# Altium PCB HEBoard_ver4.PcbDoc
Units mm, origin at the board's own origin, x right, y up, seen from the top; angles counter-clockwise.
Board outline 48.51 x 77.37 mm, 4 copper layers (Top Layer, GND, 3V3, Bottom Layer), stack 0.776 mm thick; 52 components, 33 nets, 207 pads, 91 vias.
Unrouted connection lines stored in the file: 2.
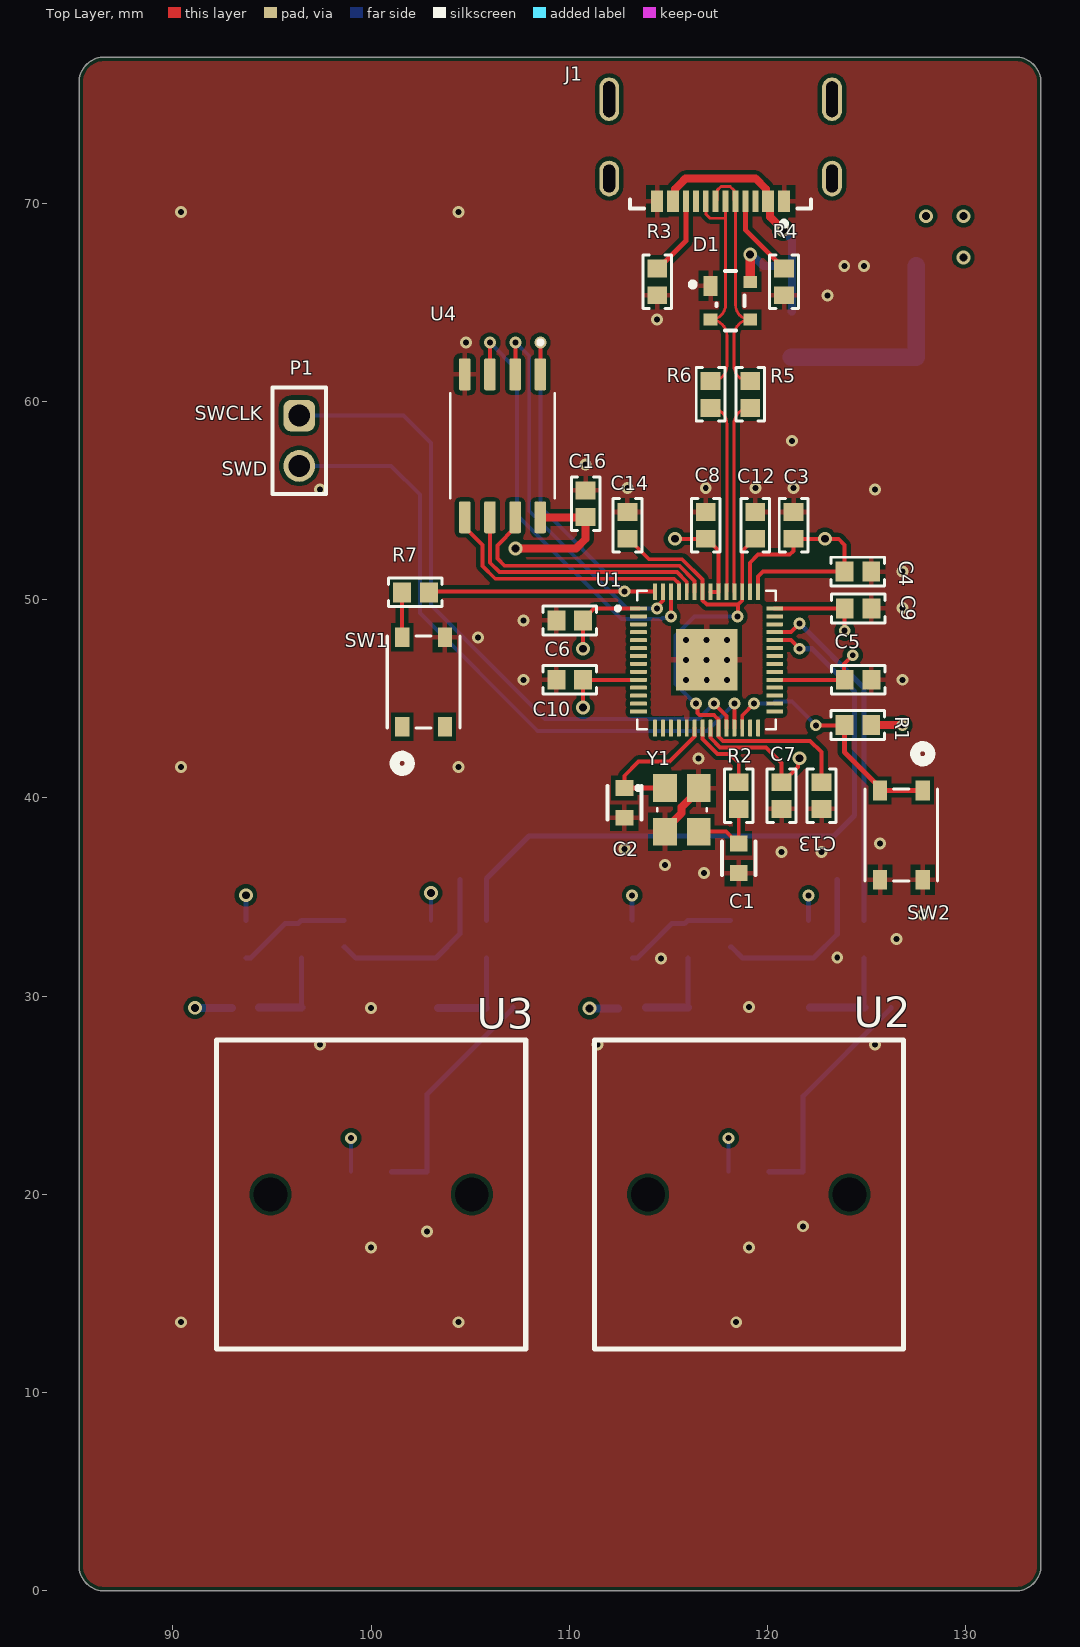
[diagram p0: Top Layer view]
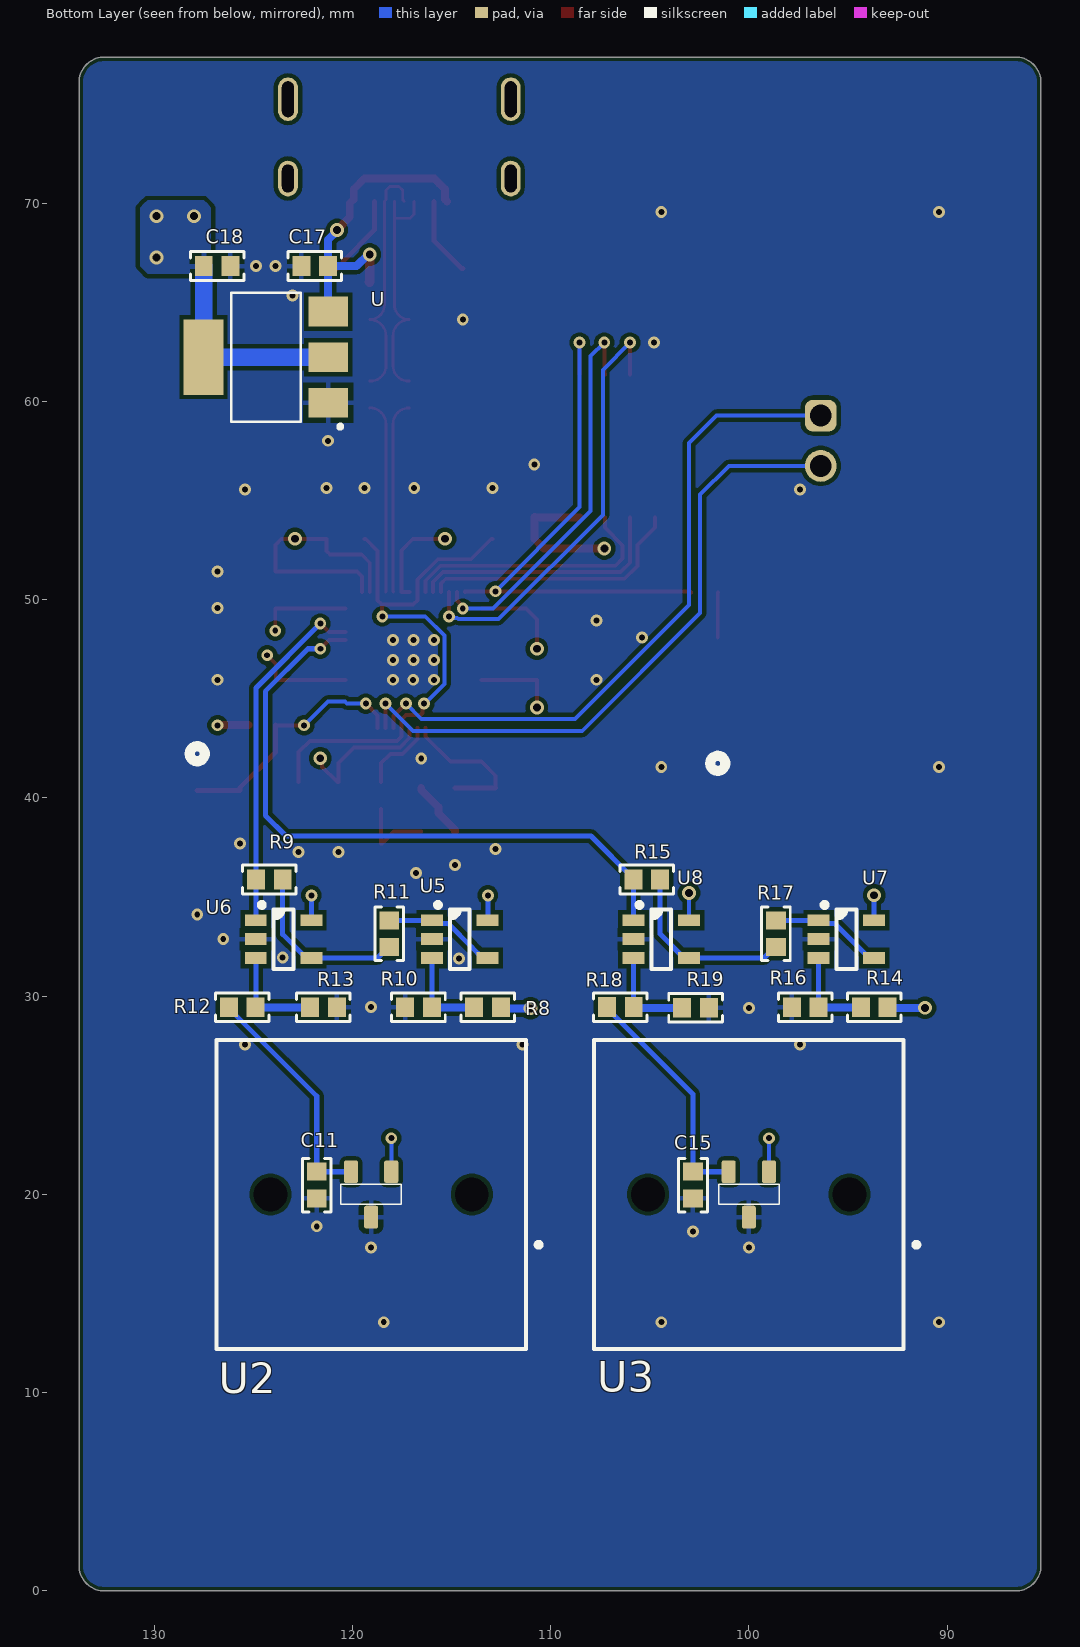
[diagram p1: Bottom Layer view, seen from below]
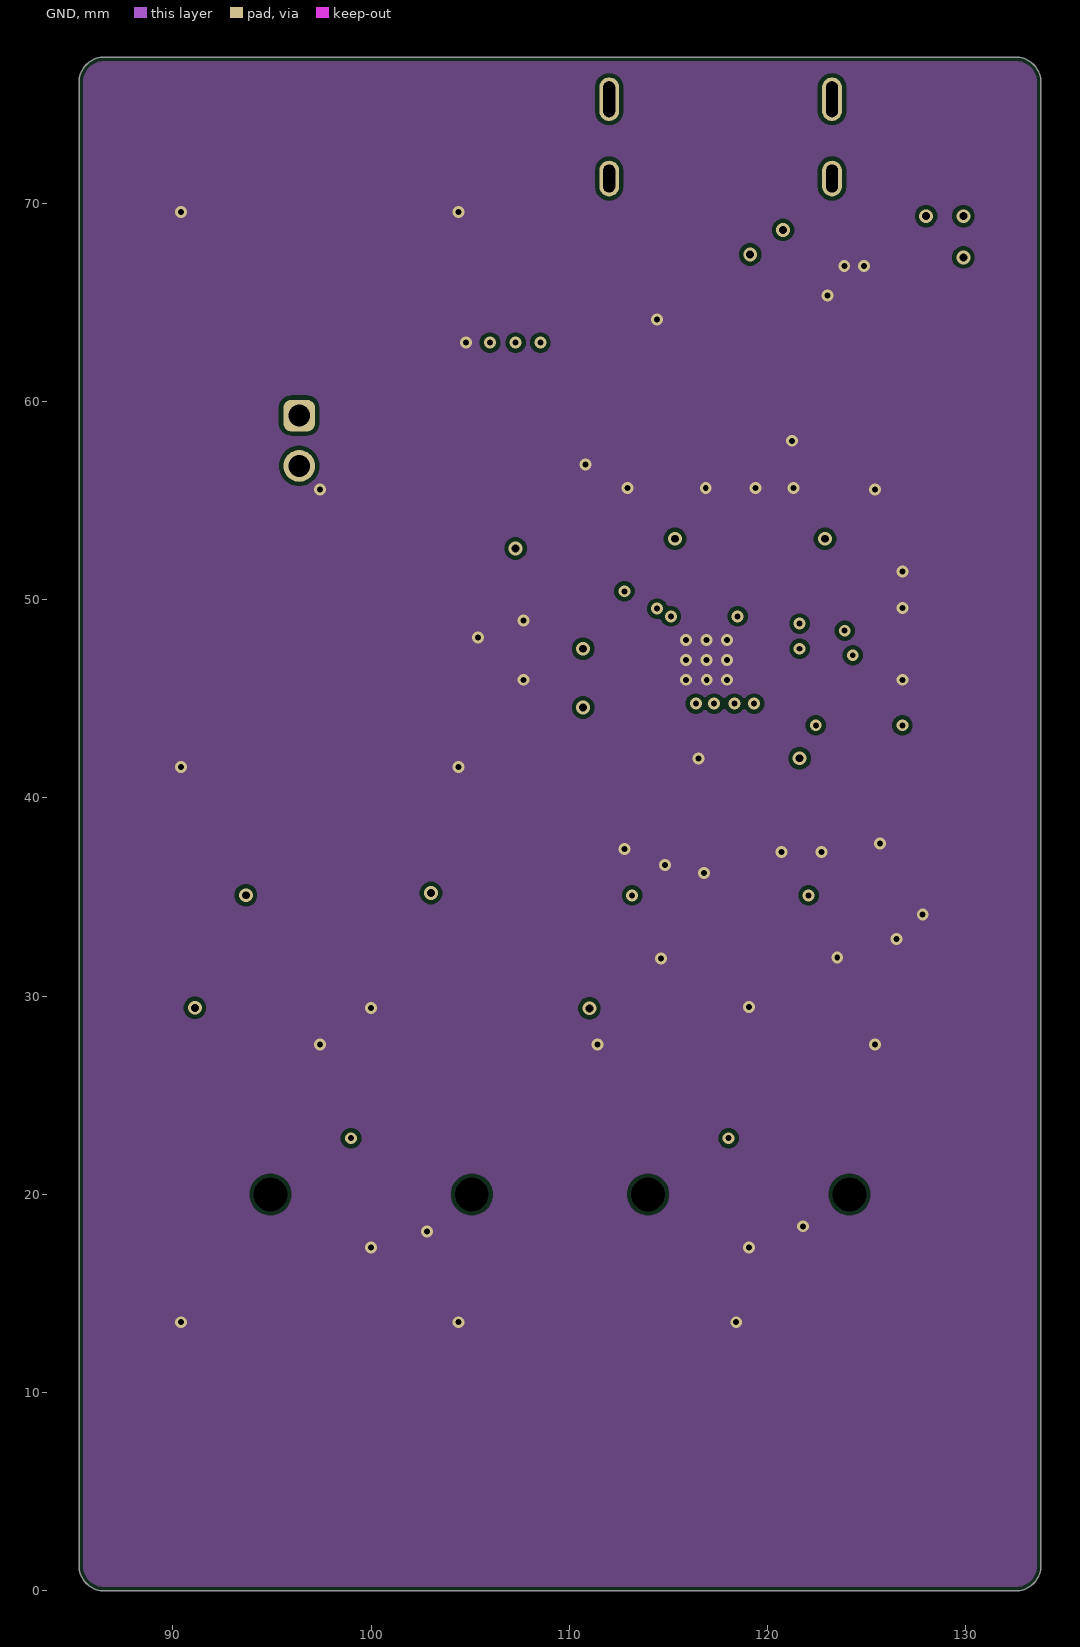
[diagram p2: GND]
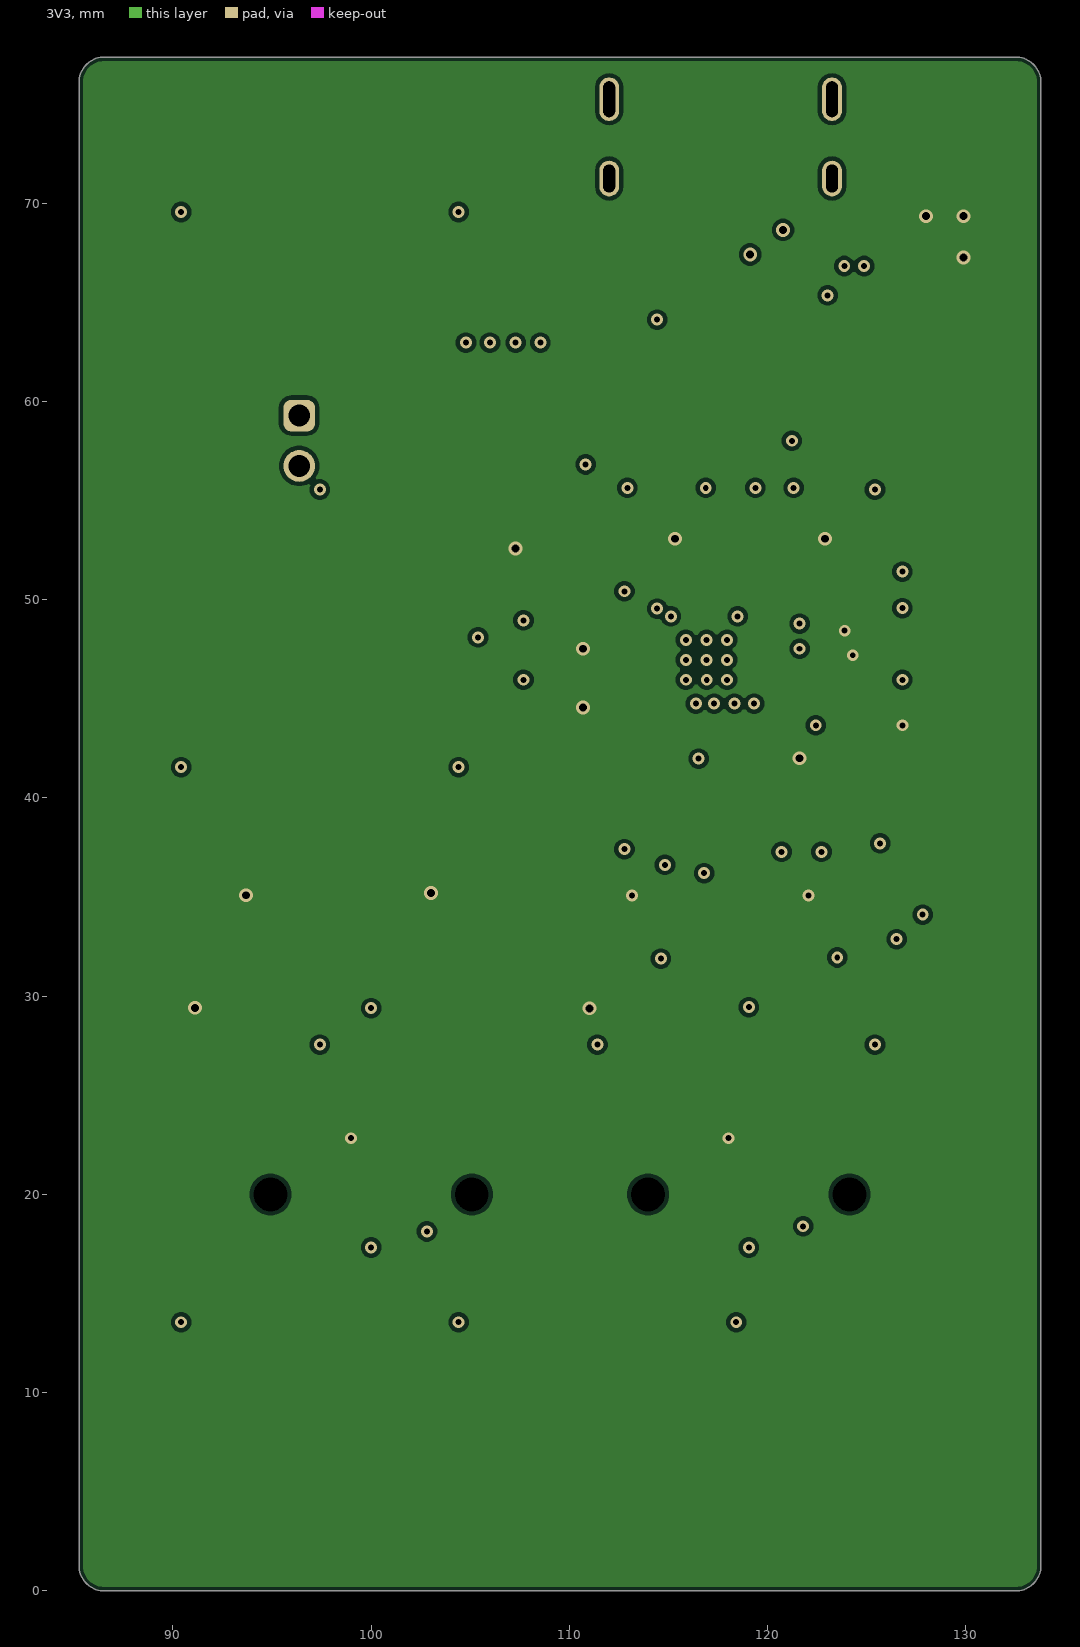
[diagram p3: 3V3]
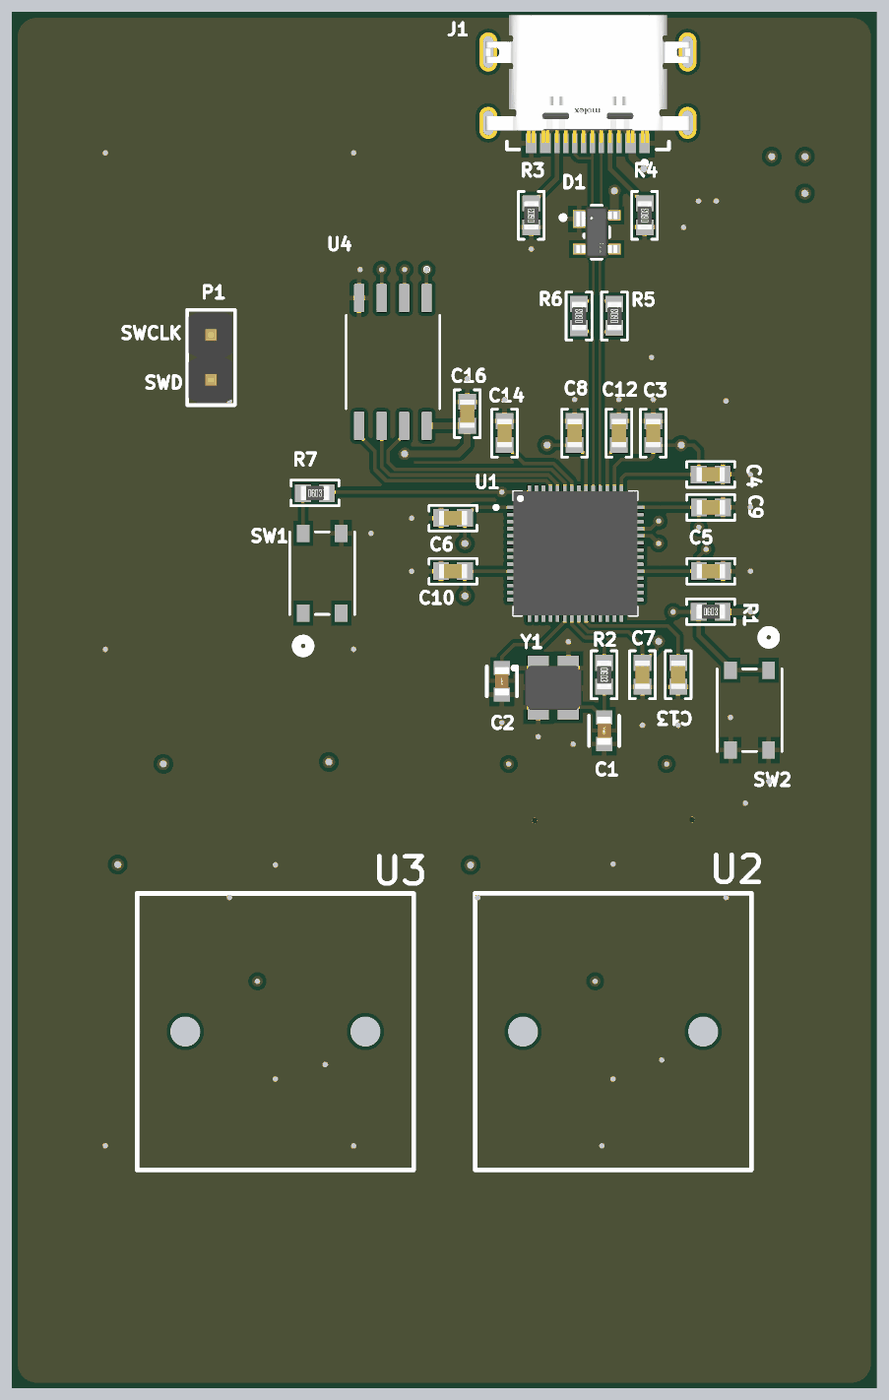
[diagram p4: 3D render of the assembled board from above, using the file's embedded part models]
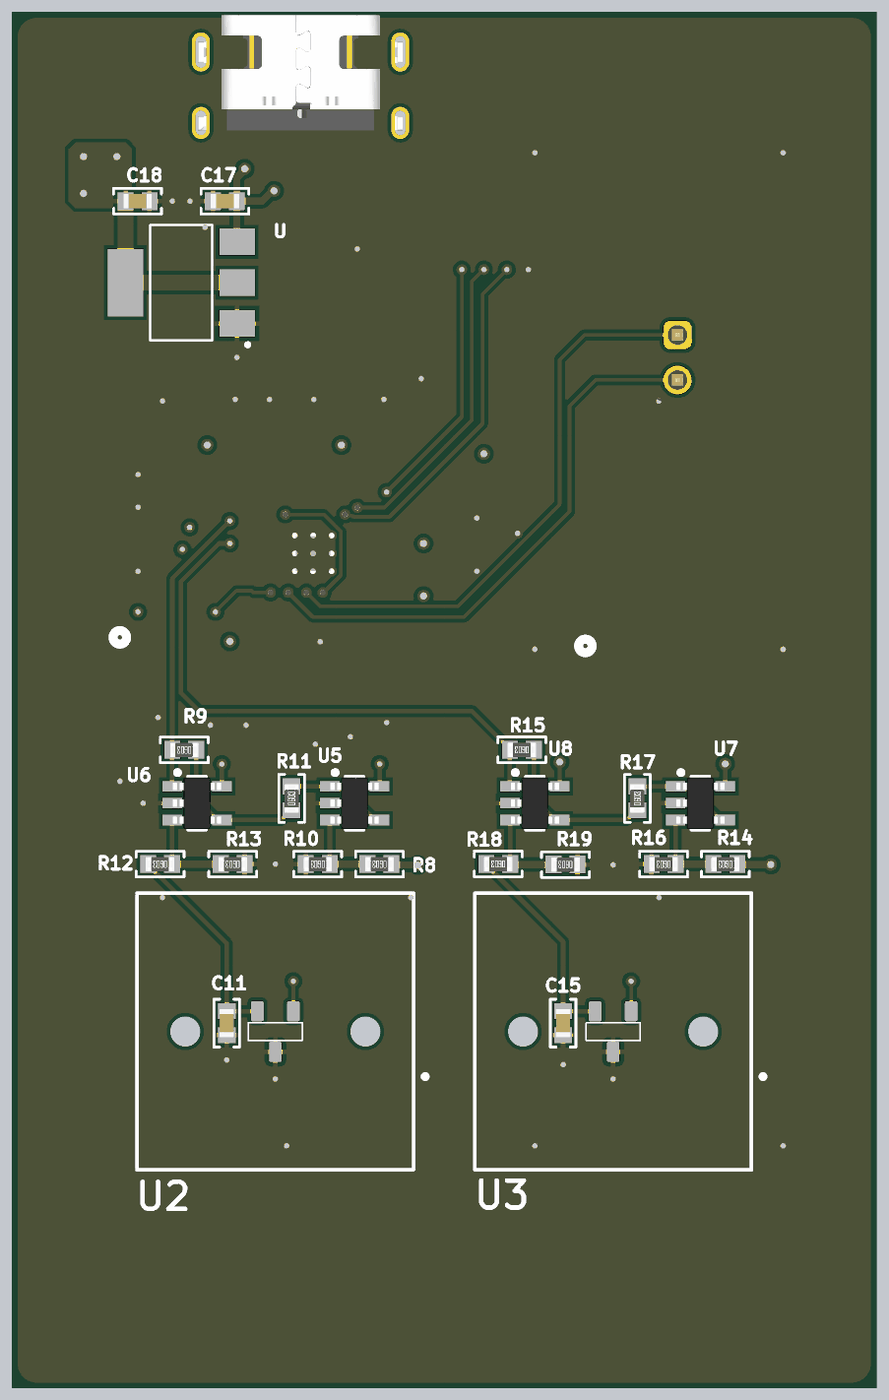
[diagram p5: 3D render of the assembled board from below, using the file's embedded part models]

## Layer stack, top to bottom
Top Solder: solder mask 0.0254, Solder Resist, Dk 4
Top Layer: signal copper 0.0356
Dielectric 1: core 0.254, FR-4, Dk 4.2
GND: signal copper 0.035
Dielectric1: prepreg 0.127, FR-4, Dk 4.2
3V3: signal copper 0.035
Dielectric 2: core 0.254, FR-4, Dk 4.2
Bottom Layer: signal copper 0.0356
Bottom Solder: solder mask 0.0254, Solder Resist, Dk 4

## Board outline
85.268,1.27 85.268,76.098 cw(c86.538,76.098) 86.538,77.368 132.512,77.368 cw(c132.512,76.098) 133.782,76.098 133.782,1.27 cw(c132.512,1.27) 132.512,0 86.538,0 cw(c86.538,1.27)

## Design rules (kind name [scope] priority, off if disabled: settings)
BoardOutlineClearance [All] p1: gap=0.2 ignorepadtopadclearanceinfootprint=FALSE except(0.4: Arc-SplitBarrior Arc-SplitContinuation Track-SplitBarrior Track-SplitContinuation SMDPad-SplitBarrior SMDPad-SplitContinuation THPad-SplitBarrior THPad-SplitContinuation Via-SplitBarrior Via-SplitContinuation Fill-SplitBarrior Fill-SplitContinuation Poly-SplitBarrior Poly-SplitContinuation Region-SplitBarrior Region-SplitContinuation Text-SplitBarrior Text-SplitContinuation)
Clearance [All] p1: gap=0.2 ignorepadtopadclearanceinfootprint=FALSE except(0.127: Arc-Arc Arc-Track Arc-SMDPad Arc-Via Track-Track Track-SMDPad Track-Via SMDPad-SMDPad SMDPad-Via THPad-Via Via-Via; 0.15: Arc-Text Track-Text SMDPad-Text THPad-Text Via-Text Fill-Text Poly-Text Region-Text Text-Text; 0.208: Arc-Poly Track-Poly SMDPad-Poly THPad-Poly Via-Poly Fill-Poly Poly-Poly)
ComponentClearance ComponentClearance_2 [InComponent('U3')] p1: gap=0 collisioncheckmode=3 verticalgap=0 showdistances=FALSE
ComponentClearance ComponentClearance_1 [InComponent('U2')] p2: gap=0 collisioncheckmode=3 verticalgap=0 showdistances=FALSE
ComponentClearance [All] p3: gap=0.254 collisioncheckmode=3 verticalgap=0.254 showdistances=FALSE
DiffPairsRouting [All] p1: maxlimit=0.208 minlimit=0.208 mostfreqgap=0.208 toplayer_minwidth=0.142 toplayer_maxwidth=0.142 toplayer_prefwidth=0.142 midlayer1_minwidth=0.381 midlayer1_maxwidth=0.381 midlayer1_prefwidth=0.381 midlayer2_minwidth=0.381 midlayer2_maxwidth=0.381 midlayer2_prefwidth=0.381 bottomlayer_minwidth=0.142 bottomlayer_maxwidth=0.142 bottomlayer_prefwidth=0.142 impedanceprofiledriven=TRUE maxuncoupledlength=12.7
HoleSize [All] p1: absolutevalues=TRUE maxlimit=6.3 minlimit=0.2 maxpercent=80.000 minpercent=20.000
MinimumAnnularRing [All] p1: minimumring=0.1
MinimumSolderMaskSliver [All] p1: minsoldermaskwidth=0.026
PlaneConnect [InNamedPolygon('+3V3_L04_P003')] p1: planeconnectstyle=Direct reliefexpansion=0.508 reliefentries=4 reliefconductorwidth=0.254 reliefairgap=0.254
PlaneConnect PlaneConnect_1 [All] p2: planeconnectstyle=Relief reliefexpansion=0.508 reliefentries=4 reliefconductorwidth=0.254 reliefairgap=0.254
PolygonConnect PolygonConnect_1 [All] p1: thpad.connectstyle=Relief thpad.reliefconductorwidth=0.254 thpad.reliefentries=4 thpad.polygonreliefangle="90 Angle" thpad.airgapwidth=0.254 smdpad.connectstyle=Relief smdpad.reliefconductorwidth=0.254 smdpad.reliefentries=4 smdpad.polygonreliefangle="90 Angle" smdpad.airgapwidth=0.254 via.connectstyle=Direct via.reliefconductorwidth=0.508 via.reliefentries=4 via.polygonreliefangle="90 Angle" via.airgapwidth=0.254
RoutingCorners [All] p1: cornerstyle=Round minsetback=2.54 maxsetback=2.54
RoutingVias [All] p1: holewidth=0.3 width=0.5 viastyle="Through Hole" minholewidth=0.3 minwidth=0.5 maxholewidth=6.3 maxwidth=10
SilkToSilkClearance [All] p1: silktosilkclearance=0.1
SilkToSolderMaskClearance [IsPad] p1: minsilkscreentomaskgap=0.15 clearancetoexposedcopper=TRUE
SolderMaskExpansion [All] p1: expansion=0.038 istentingtop=FALSE
Width [All] p1: maxlimit=10 minlimit=0.2 preferedwidth=0.254
22 further rules are at their usual default settings.

## Classes and differential pairs
component class HEBoard_ver4: C1 C2 C3 C4 C5 C6 C7 C8 C9 C10 C11 C12 C13 C14 C15 C16 C17 C18 D1 J1 P1 R1 R2 R3 R4 R5 R6 R7 SW1 SW2 U U1 U2 U3 U4 Y1
component class HEBoard_AFE: R8 R9 R10 R11 R12 R13 R14 R15 R16 R17 R18 R19 U5 U6 U7 U8
differential pair D: +D_P -D_N

## Components (designator, comment, footprint, x,y, rotation, side; value= is the part's Value field where it differs from the comment)
C1 "15pF" FP-CC0603-0_9-MFG 118.542,36.957 r270 top
C2 "15pF" FP-CC0603-0_9-MFG 112.776,39.751 r270 top
C3 "CAP CER 1UF 50V X5R 0603" "CAP 0603_1608" 121.31,53.746 r270 top
C4 "CAP CER 0.1UF 100V 10% X7R 0603" "CAP 0603_1608" 124.552,51.415 r180 top
C5 "CAP CER 0.1UF 100V 10% X7R 0603" "CAP 0603_1608" 124.562,45.959 r180 top
C6 "CAP CER 0.1UF 100V 10% X7R 0603" "CAP 0603_1608" 110.018,48.954 r0 top
C7 "CAP CER 0.1UF 100V 10% X7R 0603" "CAP 0603_1608" 120.701,40.117 r90 top
C8 "CAP CER 0.1UF 100V 10% X7R 0603" "CAP 0603_1608" 116.877,53.746 r270 top
C9 "CAP CER 0.1UF 100V 10% X7R 0603" "CAP 0603_1608" 124.562,49.559 r180 top
C10 "CAP CER 0.1UF 100V 10% X7R 0603" "CAP 0603_1608" 110.018,45.959 r0 top
C11 "CAP CER 0.1UF 100V 10% X7R 0603" "CAP 0603_1608" 121.793,20.472 r270 bottom
C12 "CAP CER 1UF 50V X5R 0603" "CAP 0603_1608" 119.377,53.746 r270 top
C13 "CAP CER 0.1UF 100V 10% X7R 0603" "CAP 0603_1608" 122.719,40.117 r90 top
C14 "CAP CER 0.1UF 100V 10% X7R 0603" "CAP 0603_1608" 112.926,53.746 r270 top
C15 "CAP CER 0.1UF 100V 10% X7R 0603" "CAP 0603_1608" 102.819,20.472 r270 bottom
C16 "CAP CER 0.1UF 100V 10% X7R 0603" "CAP 0603_1608" 110.82,54.839 r270 top
C17 "CAP CER 10UF 25V 20% X5R 0603" "CAP 0603_1608" 121.895,66.827 r180 bottom
C18 "CAP CER 10UF 25V 20% X5R 0603" "CAP 0603_1608" 126.822,66.827 r180 bottom
D1 "PRTR5V0U2X,215" FP-SOT143B-MFG 118.124,65.077 r0 top
J1 "216990-0001" FP-216990-0001-MFG 117.627,74.092 r180 top
P1 "61300211121" 61300211121 96.371,58.014 r270 top
R1 "RES 1K OHM 1% 1/10W 0603" "RES 0603_1608" 124.552,43.678 r0 top
R2 "RES 1K OHM 1% 1/10W 0603" "RES 0603_1608" 118.542,40.117 r270 top
R3 "RES 5.1K OHM 1% 1/10W 0603" "RES 0603_1608" 114.427,66.027 r90 top
R4 "RES 5.1K OHM 1% 1/10W 0603" "RES 0603_1608" 120.827,66.027 r90 top
R5 "RES 22.1 OHM 1% 1/10W 0603" "RES 0603_1608" 119.124,60.35 r90 top
R6 "RES 22.1 OHM 1% 1/10W 0603" "RES 0603_1608" 117.123,60.35 r90 top
R7 "RES 1K OHM 1% 1/10W 0603" "RES 0603_1608" 102.235,50.368 r0 top
R8 "RES 2.21K OHM" "RES 0603_1608" 113.179,29.439 r0 bottom
R9 "RES 5.1K OHM 1% 1/10W 0603" "RES 0603_1608" 124.186,35.88 r0 bottom
R10 "RES 4.7K OHM" "RES 0603_1608" 116.662,29.439 r0 bottom
R11 "RES 1.6K OHM 1% 1/10W 0603" "RES 0603_1608" 118.135,33.147 r90 bottom
R12 "RES 1.6K OHM 1% 1/10W 0603" "RES 0603_1608" 125.55,29.439 r0 bottom
R13 "RES 5.1K OHM 1% 1/10W 0603" "RES 0603_1608" 121.456,29.439 r0 bottom
R14 "RES 2.21K OHM" "RES 0603_1608" 93.672,29.439 r0 bottom
R15 "RES 5.1K OHM 1% 1/10W 0603" "RES 0603_1608" 105.148,35.888 r0 bottom
R16 "RES 4.7K OHM" "RES 0603_1608" 97.155,29.439 r0 bottom
R17 "RES 1.6K OHM 1% 1/10W 0603" "RES 0603_1608" 98.635,33.147 r90 bottom
R18 "RES 1.6K OHM 1% 1/10W 0603" "RES 0603_1608" 106.481,29.446 r0 bottom
R19 "RES 5.1K OHM 1% 1/10W 0603" "RES 0603_1608" 102.688,29.413 r0 bottom
SW1 "PTS815 SJM 250 SMTR LFS" "SW4_PTS815 SJM 250 SMTR LFS_CNK" 102.641,45.847 r90 top
SW2 "PTS815 SJM 250 SMTR LFS" "SW4_PTS815 SJM 250 SMTR LFS_CNK" 126.746,38.125 r270 top
U "NCP1117LPST33T3G" SOT230P700X175-4N 124.358,62.23 r0 bottom
U1 "RP2040_1" QFN40P700X700X90-57N 116.92,46.959 r0 top
U2 "SS39ET" CHRY-MX1A-11NW_V 119.05,20 r0 bottom
U3 "SS39ET" CHRY-MX1A-11NW_V 100,20 r0 bottom
U4 "W25Q128JVSIQ" SOIC127P790X216-8N 106.629,57.76 r270 top
U5 "IC OPAMP GP 1 CIRCUIT SOT23-5" "SOT 23-5" 114.579,32.878 r180 bottom
U6 "IC OPAMP GP 1 CIRCUIT SOT23-5" "SOT 23-5" 123.466,32.878 r180 bottom
U7 "IC OPAMP GP 1 CIRCUIT SOT23-5" "SOT 23-5" 95.079,32.878 r180 bottom
U8 "IC OPAMP GP 1 CIRCUIT SOT23-5" "SOT 23-5" 104.416,32.878 r180 bottom
Y1 "12MHz" XTAL_ABM8G-12.000MHZ-4Y-T3 115.672,39.395 r0 top

## Footprints (in the part's own frame and the unit in brackets; to place one, negate y for a bottom-side part, rotate by r counter-clockwise, add the part's x,y. Pads: shape width x height; smd on the part's side, far side on the other; paste and mask are expansions set on the pad)
61300211121 [mm] "Pin Header, pitch 2.54 mm, THT, Vertical, single row, 2p"
  rrect50% 1.6x1.6 hole 1.1: 1(-1.27,0)
  round 1.6 hole 1.1: 2(1.27,0)
  silkscreen extent -2.69,-1.35 2.69,1.35, body extent -2.54,-1.27 2.54,1.27, height 8.57
"CAP 0603_1608" [mm] "Chip Capacitor, 2-Leads, Body 1.60x0.80mm, IPC Medium Density"
  rect 0.9x1 smd: 1(-0.675,0) 2(0.675,0)
  silkscreen extent -1.35,-0.72 1.35,0.72, body extent -0.8,-0.41 0.8,0.41, height 0.82
CHRY-MX1A-11NW_V [mil] "THD, 2-Leads, Body 15.6x15.6mm"
  rrect30% 28x45 smd: 1(-40,-45) 2(40,-45) 3(0,45)
  round 0 hole 67 unplated paste-99999: MH2(-200,0) MH3(200,0)
  silkscreen extent -338,-307 307,307
FP-216990-0001-MFG [mm]
  rrect100% 1x1.8 hole 1.4 slot 0.6 at 0 deg paste-2539.97 mask+0: 1(-5.62,2.85) 2(5.62,2.85)
  rrect100% 1x2.2 hole 1.8 slot 0.6 at 0 deg paste-2539.97 mask+0: 3(-5.62,-1.15) 4(5.62,-1.15)
  rect 0.6x1.1 smd paste+0 mask+0: A1-B12(-3.2,4) A4-B9(-2.4,4) A9-B4(2.4,4) A12-B1(3.2,4)
  rect 0.3x1.1 smd paste+0 mask+0: A5(-1.25,4) A6(-0.25,4) A7(0.25,4) A8(1.25,4) B5(1.75,4) B6(0.75,4) B7(-0.75,4) B8(-1.75,4)
  silkscreen extent -4.57,3.9 4.57,5.25, body extent -6.22,-3.45 6.22,4.65, height 0.25
FP-CC0603-0_9-MFG [mm]
  rect 0.8x0.9 smd paste+0 mask+0: 1(-0.75,0) 2(0.75,0)
  silkscreen extent -0.85,-0.85 0.85,0.85, body extent -1.43,-0.82 1.43,0.82, height 0.25
FP-SOT143B-MFG [mm]
  rect 0.7x1 smd paste-1000 mask+0: 1(-1,0.75)
  rect 0.7x0.6 smd paste-1000 mask+0: 2(-1,-0.95) 3(1,-0.95) 4(1,0.95)
  silkscreen extent -2.02,-1.5 0.7,1.5, body extent -1.5,-1.63 1.5,1.63, height 0.25
QFN40P700X700X90-57N [mm]
  rrect25% 0.84x0.2 smd: 1(-3.435,2.6) 2(-3.435,2.2) 3(-3.435,1.8) 4(-3.435,1.4) 5(-3.435,1) 6(-3.435,0.6) 7(-3.435,0.2) 8(-3.435,-0.2) 9(-3.435,-0.6) 10(-3.435,-1) 11(-3.435,-1.4) 12(-3.435,-1.8) 13(-3.435,-2.2) 14(-3.435,-2.6) 29(3.435,-2.6) 30(3.435,-2.2) 31(3.435,-1.8) 32(3.435,-1.4) 33(3.435,-1) 34(3.435,-0.6) 35(3.435,-0.2) 36(3.435,0.2) 37(3.435,0.6) 38(3.435,1) 39(3.435,1.4) 40(3.435,1.8) 41(3.435,2.2) 42(3.435,2.6)
  rrect25% 0.2x0.84 smd: 15(-2.6,-3.435) 16(-2.2,-3.435) 17(-1.8,-3.435) 18(-1.4,-3.435) 19(-1,-3.435) 20(-0.6,-3.435) 21(-0.2,-3.435) 22(0.2,-3.435) 23(0.6,-3.435) 24(1,-3.435) 25(1.4,-3.435) 26(1.8,-3.435) 27(2.2,-3.435) 28(2.6,-3.435) 43(2.6,3.435) 44(2.2,3.435) 45(1.8,3.435) 46(1.4,3.435) 47(1,3.435) 48(0.6,3.435) 49(0.2,3.435) 50(-0.2,3.435) 51(-0.6,3.435) 52(-1,3.435) 53(-1.4,3.435) 54(-1.8,3.435) 55(-2.2,3.435) 56(-2.6,3.435)
  rect 3.1x3.1 smd paste-0.57: 57(0,0)
  silkscreen extent -4.57,-3.5 3.5,3.5, body extent -3.5,-3.5 3.5,3.5, height 0.9
"RES 0603_1608" [mm] "Chip Resistor, 2-Leads, Body 1.60x0.80mm, IPC Medium Density"
  rect 0.9x1 smd: 1(-0.675,0) 2(0.675,0)
  silkscreen extent -1.35,-0.72 1.35,0.72, body extent -0.8,-0.4 0.8,0.4, height 0.45
SOIC127P790X216-8N [mm]
  rrect25% 1.61x0.58 smd: 1(-3.605,1.905) 2(-3.605,0.635) 3(-3.605,-0.635) 4(-3.605,-1.905) 5(3.605,-1.905) 6(3.605,-0.635) 7(3.605,0.635) 8(3.605,1.905)
  silkscreen extent -5.31,-2.64 2.64,2.64
SOT230P700X175-4N [mm]
  rect 2x1.5 smd: 1(-3.15,2.3) 2(-3.15,0) 3(-3.15,-2.3)
  rect 2x3.8 smd: 4(3.15,0)
  silkscreen extent -3.85,-3.25 1.75,3.6
"SOT 23-5" [mm] "SOT23, 5-Leads, Body 2.90x2.70mm, Pitch 0.95mm, IPC Medium Density"
  rect 1.1x0.6 smd: 1(-1.4,0.95) 2(-1.4,0) 3(-1.4,-0.95) 4(1.4,-0.95) 5(1.4,0.95)
  silkscreen extent -1.23,-1.5 0.5,1.85, body extent -1.36,-1.45 1.36,1.45, height 1.19
"SW4_PTS815 SJM 250 SMTR LFS_CNK" [mm]
  rect 0.991x0.711 smd paste+0 mask+0: 1(-2.25,1.075) 2(2.25,1.075) 3(-2.25,-1.075) 4(2.25,-1.075)
  silkscreen extent -4.48,-1.83 2.32,1.83
XTAL_ABM8G-12.000MHZ-4Y-T3 [mm]
  rect 1.2x1.4 smd: 1(-0.85,1.1) 2(-0.85,-1.1) 3(0.85,-1.1) 4(0.85,1.1)
  silkscreen extent -2.3,-0.08 1.25,1.2, body extent -1.6,-1.24 1.6,1.24, height 0.99

## Part data
C1 C2: library part CMP-03422-001493-1, "CAP CER 15PF 50V C0G/NPO 0603", Case Code (Imperial)=0603, Case Code (Metric)=1608, Dielectric=C0G, Dielectric Material=Ceramic, Insulation Resistance=100GR, Max Operating Temperature=125°C, Min Operating Temperature=-55°C, Package Quantity=1, Tolerance=5%, Voltage Rating=50V, Capacitance=15pF, Case/Package=0603, Depth=0.8mm, Height=0.8mm, Lead Free="Lead Free", Length=1.6mm, Mount="Surface Mount", Number of Pins=2, Packaging="Tape and Reel", Radiation Hardening=No, REACH SVHC="No SVHC", RoHS Compliant=Yes, Series=CC, Termination=SMD/SMT, Thickness=0.035inch, Width=0.031inch
C3 C12: library part CMP-013-0013-8, "1µF ±10% 50V Ceramic Capacitor X7R 0603 (1608 Metric)", Capacitance=1µF, Case/Package=0603, Dielectric Code=X5R, Tolerance=10%, Voltage Rating=50V
C4 C5 C6 C7 C8 C9 C10 C11 C13 C14 C15 C16: library part CMP-013-0022-14, "Ceramic Capacitor, Multilayer, Ceramic, 100V, 10% +Tol, 10% -Tol, X7R, 15% TC, 0.1uF, Surface Mount, 0603", Capacitance=100nF, Case/Package=0603, Dielectric Code=X7R, Tolerance=10%, Voltage Rating=100V
C17 C18: library part CMP-013-0018-6, "10µF ±20% 25V Ceramic Capacitor X5R 0603 (1608 Metric)", Capacitance=10µF, Case/Package=0603, Dielectric Code=X5R, Tolerance=20%, Voltage Rating=25V
D1: library part CMP-14436-000007-1, "TVS DIODE 5.5V SOT143B"
J1: library part CMP-04767-000014-1, "CONN RCP USB2.0 TYP C 24P SMD RA"
P1: library part CMP-1712-00002-5, Color=Black, Contact Resistance=20mΩ, Current Rating=3A, Max Operating Temperature=125°C, Min Operating Temperature=-40°C, Operating Supply Voltage=250V, Connector Type="Male Pin", Contact Gender=Male, Contact Material=Copper, Contact Mating Length=5.9944mm, Contact Plating=Gold, Gender=Male, Height=8.94mm, Housing Material=PBT, Lead Free="Lead Free", Lead Pitch=2.54mm, Mount="Through Hole", NexarPartId=20081794, Number of Contacts=2, Number of Pins=2, Number of Positions=2, Number of Rows=1, Orientation=Vertical, Packaging=Bulk, Pitch=2.54mm, REACH SVHC="No SVHC", RoHS=Compliant, Termination="Through Hole", Voltage Rating=250V
R1 R2 R7: library part CMP-009-00014-17, "1 kOhms ±1% 0.1W, 1/10W Chip Resistor 0603 (1608 Metric) Moisture Resistant Thick Film", Case/Package=0603, Power Rating=100mW, Resistance=1k, Temperature Coefficient=100ppm/°C, Tolerance=1%, Voltage Rating=75V
R3 R4 R9 R13 R15 R19: library part CMP-00051-2, "5.1 kOhms ±1% 0.1W, 1/10W Chip Resistor 0603 (1608 Metric) Automotive AEC-Q200 Thick Film", Case/Package=0603, Power Rating=100mW, Resistance=5.1k, Temperature Coefficient=100ppm/°C, Tolerance=1%, Voltage Rating=75V
R5 R6: library part CMP-009-00193-9, "Fixed Resistor, Metal Glaze/thick Film, 0.1W, 22.1ohm, 75V, 1% +/-Tol, 100ppm/Cel, Surface Mount, 0603", Case/Package=0603, Temperature Coefficient=100ppm/°C, Voltage Rating=75V
R8 R14: library part CMP-010-0027-7, "2.21 kOhms ±1% 0.1W, 1/10W Chip Resistor 0603 (1608 Metric) Automotive AEC-Q200, Moisture Resistant Thick Film", Case/Package=0603, Power Rating=100mW, Resistance=2.21k, Temperature Coefficient=100ppm/°C, Tolerance=1%, Voltage Rating=75V
R10 R16: library part CMP-010-0075-8, "Fixed Resistor, Metal Glaze/thick Film, 0.1W, 4700ohm, 75V, 1% +/-Tol, 100ppm/Cel, Surface Mount, 0603", Case/Package=0603, Power Rating=100mW, Resistance=4.7k, Temperature Coefficient=100ppm/°C, Tolerance=1%, Voltage Rating=75V
R11 R12 R17 R18: library part CMP-010-0019-7, "1.6 kOhms ±1% 0.1W, 1/10W Chip Resistor 0603 (1608 Metric) Moisture Resistant Thick Film", Case/Package=0603, Power Rating=100mW, Resistance=1.6k, Temperature Coefficient=100ppm/°C, Tolerance=1%, Voltage Rating=75V
SW1 SW2: "No Description Available", Mfr_Name="C&K Components", RefDes=RefDes, Type=Type
U: "Linear Voltage Regulator IC 1 Output 1A SOT-223", Package="SOT-223 ON Semiconductor", Availability=Unavailable, MF="ON Semiconductor", MP=NCP1117LPST33T3G, Price=None, SnapEDA_Link=https://www.snapeda.com/parts/NCP1117LPST33T3G/ON%20Semiconductor/view-part/421194/?ref=snap
U1: "RP2040 chip for Raspberry Pi Pico - ARMÂ® CortexÂ®-M0+ MCU 32-Bit", Package=None, Availability="In Stock", Check_prices=https://www.snapeda.com/parts/RP2040/Raspberry+Pi/view-part/?ref=eda, MF="Raspberry Pi", MP=RP2040, Price=None, Purchase-URL=https://pricing.snapeda.com/search/part/RP2040/?ref=eda, SnapEDA_Link=https://www.snapeda.com/parts/RP2040/Raspberry+Pi/view-part/?ref=snap
U2 U3: "analog Hall Effect Sensor 1.5 mA 2.7 - 6.5 V dc", Package=None, Check_prices=https://www.snapeda.com/parts/SS39ET/Honeywell+Sensing+and+Productivity+Solutions/view-part/?ref=eda, MF="Honeywell Sensing and Productivity Solutions", MP=SS39ET, SnapEDA_Link=https://www.snapeda.com/parts/SS39ET/Honeywell+Sensing+and+Productivity+Solutions/view-part/?ref=snap
U4: "FLASH - NOR Memory IC 128Mb (16M x 8) SPI - Quad I/O, QPI, DTR 133 MHz 8-SOIC", Package="SOIC-8 Winbond", Availability="In Stock", Check_prices=https://www.snapeda.com/parts/W25Q128JVSIQ/Winbond+Electronics/view-part/?ref=eda, MF="Winbond Electronics", MP=W25Q128JVSIQ, Price=None, Purchase-URL=https://pricing.snapeda.com/search/part/W25Q128JVSIQ/?ref=eda, SnapEDA_Link=https://www.snapeda.com/parts/W25Q128JVSIQ/Winbond+Electronics/view-part/?ref=snap
U5 U6 U7 U8: library part CMP-031-00034-5, "General Purpose Amplifier 1 Circuit Rail-to-Rail SOT-23-5", Case/Package=SOT-23-5, Manufacturer 1=TI, Manufacturer Part Number=TLV9051IDBVR, Max Operating Temperature=125°C, Max Supply Voltage=5.5V, Min Operating Temperature=-40°C, Min Supply Voltage=1.8V, Supplier Part Number 1=296-TLV9051IDBVRCT-ND, Mounting Technology="Surface Mount", Pins=5, Supplier 1=DigiKey
Y1: library part ABM8G-12.000MHZ-4Y-T3, "12 MHz Â±30ppm Crystal 10pF 120 Ohms 4-SMD, No Lead", Package="SMD-4 Abracon", Availability="In Stock", Check_prices=https://www.snapeda.com/parts/ABM8G-12.000MHZ-4Y-T3/Abracon+LLC/view-part/?ref=eda, MF=Abracon, MP=ABM8G-12.000MHZ-4Y-T3, Price=None, Purchase-URL=https://pricing.snapeda.com/search/part/ABM8G-12.000MHZ-4Y-T3/?ref=eda, SnapEDA_Link=https://www.snapeda.com/parts/ABM8G-12.000MHZ-4Y-T3/Abracon+LLC/view-part/?ref=snap

## Via types
v1: diameter 0.6, hole 0.3, Top Layer to Bottom Layer, tented both sides, 76 vias
v2: diameter 0.7, hole 0.4, Top Layer to Bottom Layer, tented both sides, 15 vias

## Nets (pads, with @x,y where several pads share a name; then routed paths per layer and width w, separated by ;. In a path a pad name is that pad's centre, name@x,y a point inside that pad or via, vN(x,y) a via of type N, cw(c..) or ccw(c..) an arc to the next point about the centre after c; other vN are vias at no path point)
+1V1: C12.2 C13.2 C14.2 U1.23 U1.45 U1.50 | length 29
  Top Layer w0.2: C14.2 112.976,53.071 114.009,52.038 115.689,52.038 116.72,51.007 U1.50 116.72,49.967 116.94,49.747 118.499,49.747 ; v1(116.377,44.759) 116.454,44.682 116.454,44.288 116.571,44.171 116.737,44.171 117.299,44.171 117.52,43.95 U1.23 117.52,43.097 117.74,42.877 117.964,42.877 117.965,42.875 122.143,42.875 122.709,42.309 C13.2@122.709,40.792 ; v1@118.356,49.235 v1@118.391,49.235 ; v1(118.488,49.159) 118.412,49.235 v1@118.391,49.235 ; C12.2 119.327,53.071 118.72,52.464 U1.45 118.72,49.967 118.499,49.747 ; v1@118.391,49.235 118.499,49.343 118.499,49.747
  Bottom Layer w0.2: v1(116.377,44.759) 116.332,44.759 115.35,45.74 115.35,48.188 116.32,49.159 v1(118.488,49.159)
+3V3: C3.2 C4.2 C5.2 C6.2 C7.2 C8.2 C9.2 C10.2 C16.2 C18.1 R1.2 R8.1 R14.1 U1.1 U1.10 U1.22 U1.33 U1.42 U1.43 U1.44 U1.48 U1.49 U2.1 U3.1 U4.8 U5.5 U6.5 U7.5 U8.5 U.2 U.4 | length 75.7
  Top Layer w0.2: v2(110.693,44.559) C10.2 113.165,45.959 U1.10 ; v2(110.693,47.523) C6.2 110.693,49.004 111.248,49.559 U1.1 ; v2(115.327,53.071) C8.2 116.927,53.071 117.52,52.479 U1.48 U1.49 ; U1.22 117.12,43.035 117.605,42.55 117.828,42.55 117.83,42.548 119.913,42.548 120.701,41.761 C7.2 120.751,40.792 121.52,41.561 121.52,41.903 v2(121.615,41.999) ; U1.44 119.12,51.862 119.524,52.267 121.114,52.267 121.31,52.464 C3.2 v2(122.89,53.071) 123.563,53.071 123.877,52.758 C4.2 119.755,51.415 119.52,51.179 U1.43 ; U1.33 C5.2 123.861,45.984 123.861,46.765 v1(124.292,47.196) ; U1.42 C9.2 ; v1(123.887,48.434) C9.2
  Top Layer w0.4: v2(107.29,52.581) 110.334,52.581 110.82,53.067 C16.2 110.811,54.155 U4.8 ; R1.2 125.234,43.67 126.789,43.67 v1(126.797,43.663)
  Bottom Layer w0.2: R14.1@92.971,29.413 R14.1 ; U3.1 v1(98.984,22.835) ; U8.5 v2(103.016,35.202) ; R8.1@112.454,29.389 R8.1 ; U5.5@113.162,33.845 U5.5 ; U2.1 v1(118.034,22.835)
  Bottom Layer w0.254: U7.5 v2(93.679,35.091) ; U5.5@113.162,33.845 v1(113.162,35.083) ; U6.5 v1(122.066,35.083)
  Bottom Layer w0.4: v2(91.11,29.413) R14.1@92.971,29.413 ; v2(111.009,29.389) R8.1@112.454,29.389
  Bottom Layer w0.9: U.2 127.486,62.23 127.497,62.241 C18.1
  other v2: 129.87,67.263 127.991,69.342 129.87,69.342
+5V: C17.2 D1.4 J1.A4-B9 J1.A9-B4 U.3 | length 16.1
  Top Layer w0.4: J1.A9-B4 115.327,70.192 115.327,70.704 115.592,70.969 115.861,71.238 119.394,71.238 119.927,70.704 119.927,70.192 120.127,69.992 120.127,69.302 v2(120.777,68.652)
  Top Layer w0.5: v2(119.12,67.412) 119.122,67.41 119.122,66.029 D1.4
  Bottom Layer w0.4: v2(119.12,67.412) 119.201,67.412 119.785,66.827 C17.2 ; v2(120.777,68.652) 120.777,68.598 121.22,68.156 C17.2 ; U.3 121.22,64.541 C17.2
A1_IN: C11.1 R12.2 U2.2 | length 11.9
  Bottom Layer w0.254: U2.2 121.789,21.143 C11.1 121.793,24.957 126.225,29.389 R12.2
A2_IN: C15.1 R18.2 U3.2 | length 11.9
  Bottom Layer w0.254: U3.2 102.815,21.143 C15.1 102.819,25.06 107.156,29.396 R18.2
AFE_OUT1: R9.2 U1.39 U6.1 | length 17.8
  Top Layer w0.2: U1.39 121.18,48.359 v1(121.615,48.793)
  Bottom Layer w0.254: v1(121.615,48.793) 124.861,45.548 R9.2 124.866,35.875 U6.1
AFE_OUT2: R15.2 U1.38 U8.1 | length 33.4
  Top Layer w0.2: U1.38 121.18,47.959 v1(121.615,47.523)
  Bottom Layer w0.254: U8.1 105.823,33.835 R15.2 105.823,35.938 107.959,38.075 123.342,38.075 124.384,39.116 124.384,45.377 122.238,47.523 v1(121.615,47.523)
CS: R7.2 U1.56 U4.1 | length 27.4
  Top Layer w0.2: R7.2 102.964,50.422 v1(112.776,50.422) 114.32,50.422 U1.56 ; U4.1 v1(108.534,62.967)
  Bottom Layer w0.2: v1(108.534,62.967) 108.534,54.664 v1(112.776,50.422)
D_N: D1.3 J1.A7 J1.B7 R5.1 R5.2 U1.46 | length 22.4
  Top Layer w0.142: J1.A7@117.377,70.092 117.456,70.171 117.456,70.651 117.645,70.84 118.109,70.84 118.298,70.651 118.298,70.171 J1.B7 118.377,64.873 ccw(c119.124,64.873) D1.3 ccw(c119.124,63.302) 118.298,63.302 118.298,61.798 ccw(c119.071,61.798) 119.071,61.025 R5.2 ; U1.46 cw(c118.32,50.415) 118.298,50.415 118.298,58.85 cw(c119.124,58.85) R5.1
D_P: D1.2 J1.A6 J1.B6 R6.1 R6.2 U1.47 | length 22
  Top Layer w0.142: J1.B6 116.891,70.078 116.891,69.444 117.094,69.24 117.877,69.24 ; R6.1 cw(c117.123,58.849) 117.949,58.849 117.949,50.422 cw(c117.92,50.422) U1.47 ; R6.2 117.175,61.025 ccw(c117.175,61.798) 117.949,61.798 117.949,63.302 ccw(c117.123,63.302) D1.2 ccw(c117.123,64.881) 117.877,64.881 117.877,69.24 ; J1.A6 117.877,69.24
GND: C1.2 C2.2 C3.1 C4.1 C5.1 C6.1 C7.1 C8.1 C9.1 C10.1 C11.2 C12.1 C13.1 C14.1 C15.2 C16.1 C17.1 C18.2 D1.1 J1.A1-B12 J1.A12-B1 R3.1 R4.1 R10.2 R13.1 R16.2 R19.1 SW1.4 SW2.2 SW2.4 U1.19 U1.57 U2.3 U3.3 U4.4 U5.2 U6.2 U7.2 U8.2 U.1 Y1.2 Y1.4 | length 2.9
  Top Layer w0.4: Y1.2 114.822,38.395 115.658,39.232 115.658,39.532 116.522,40.395 Y1.4
  other v1: 90.414,13.554 104.414,13.554 118.414,13.554 100,17.323 119.05,17.323 102.815,18.132 121.793,18.392 97.414,27.554 111.414,27.554 125.414,27.554 100,29.396 119.05,29.446 114.615,31.89 123.511,31.953 126.509,32.878 127.821,34.112 116.795,36.207 114.822,36.625 120.701,37.276 122.716,37.276 112.776,37.419 125.671,37.707 90.414,41.554 104.414,41.554 116.522,41.983 107.684,45.959 115.877,45.959 116.927,45.959 117.951,45.959 126.797,45.959 115.877,46.959 116.92,46.959 117.951,46.959 115.877,47.97 116.92,47.97 117.951,47.97 105.391,48.097 107.684,48.954 126.797,49.57 126.797,51.415 97.414,55.554 125.414,55.554 112.926,55.641 116.877,55.641 119.377,55.641 121.31,55.641 110.82,56.82 121.22,58.014 104.784,62.967 114.427,64.127 123.023,65.352 123.866,66.827 124.861,66.827 90.414,69.554 104.414,69.554
NetJ1_A5: J1.A5 R4.2 | length 4.2
  Top Layer w0.254: J1.A5 118.877,68.652 120.454,67.075 120.454,67.025 120.777,66.702 R4.2
NetJ1_B5: J1.B5 R3.2 | length 4
  Top Layer w0.254: R3.2 114.477,66.702 115.877,68.102 J1.B5
NetR2_1: R2.1 U1.21 | length 3.8
  Top Layer w0.2: U1.21 116.72,42.972 117.471,42.221 118.081,42.221 118.542,41.761 R2.1
NetR7_1: R7.1 SW1.2 | length 2.3
  Top Layer w0.2: R7.1 101.566,50.362 SW1.2
NetR8_2: R8.2 R10.1 U5.3 | length 4.6
  Bottom Layer w0.254: U5.3 115.979,29.446 R10.1
  Bottom Layer w0.4: R8.2 R10.1
NetR9_1: R9.1 R11.1 U6.4 | length 8.9
  Bottom Layer w0.254: R11.1 118.185,32.472 118.73,31.928 U6.4 122.316,31.928 123.511,33.123 R9.1
NetR11_2: R11.2 U5.1 U5.4 | length 5.7
  Bottom Layer w0.254: U5.4 113.429,31.928 113.97,32.469 113.97,32.472 115.153,33.655 115.806,33.655 U5.1 118.129,33.828 R11.2
NetR12_1: R12.1 R13.2 U6.3 | length 5.2
  Bottom Layer w0.254: U6.3 124.866,29.448 R12.1
  Bottom Layer w0.4: R13.2 R12.1
NetR14_2: R14.2 R16.1 U7.3 | length 4.6
  Bottom Layer w0.254: U7.3 96.479,31.925 96.497,31.907 96.48,31.89 R16.1
  Bottom Layer w0.4: R14.2 R16.1
NetR15_1: R15.1 R17.1 U8.4 | length 9.3
  Bottom Layer w0.254: R17.1 98.685,32.472 99.229,31.928 U8.4 103.266,31.928 104.473,33.135 R15.1
NetR17_2: R17.2 U7.1 U7.4 | length 5.7
  Bottom Layer w0.254: U7.4 93.929,31.928 95.554,33.553 95.656,33.655 96.306,33.655 U7.1 98.629,33.828 R17.2
NetR18_1: R18.1 R19.2 U8.3 | length 4.9
  Bottom Layer w0.254: R18.1@105.773,29.413 R18.1 105.816,29.456 U8.3
  Bottom Layer w0.4: R19.2 R18.1@105.773,29.413
QSPI_SCLK: U1.52 U4.6 | length 13.1
  Top Layer w0.2: U4.6 105.994,51.862 106.472,51.384 115.418,51.384 115.92,50.882 U1.52
RESET: R1.1 SW2.1 SW2.3 U1.26 | length 12.8
  Top Layer w0.2: U1.26 118.72,44.159 v1(119.32,44.759) ; v1(122.428,43.663) 123.861,43.663 R1.1
  Top Layer w0.254: R1.1 123.877,42.309 125.671,40.515 SW2.3 SW2.1
  Bottom Layer w0.2: v1(119.32,44.759) 120.279,44.759 120.38,44.86 121.231,44.86 v1(122.428,43.663)
SD0: U1.53 U4.5 | length 13.5
  Top Layer w0.2: U4.5 104.724,53.64 105.613,52.751 105.613,51.702 106.261,51.054 115.286,51.054 115.52,50.82 U1.53
SD1: U1.55 U4.2 | length 19.8
  Top Layer w0.2: U4.2 107.277,61.377 107.277,62.954 v1(107.29,62.967) ; v1(114.428,49.548) 114.428,49.656 114.72,49.947 U1.55
  Bottom Layer w0.2: v1(107.29,62.967) 107.975,62.281 107.975,54.478 112.905,49.548 v1(114.428,49.548)
SD2: U1.54 U4.3 | length 22.1
  Top Layer w0.2: U4.3 v1(105.994,62.967) ; v1(115.12,49.159) U1.54
  Bottom Layer w0.2: v1(105.994,62.967) 107.366,61.595 107.366,54.28 112.625,49.021 114.646,49.021 114.708,49.082 115.043,49.082 v1(115.12,49.159)
SD3: U1.51 U4.7 | length 13.4
  Top Layer w0.2: U4.7 107.264,53.64 106.364,52.739 106.364,52.078 106.731,51.711 115.553,51.711 116.32,50.945 U1.51
SWCLK: P1.1 U1.24 | length 33.9
  Top Layer w0.2: v1(117.299,44.759) 117.92,44.138 U1.24
  Bottom Layer w0.2: P1.1 101.626,59.284 103.016,57.893 103.016,49.727 108.761,43.982 116.522,43.982 v1(117.299,44.759)
SWD: P1.2 U1.25 | length 32.8
  Top Layer w0.2: U1.25 118.32,44.756 v1(118.322,44.759)
  Bottom Layer w0.2: P1.2 101.01,56.744 102.458,55.296 102.458,49.319 108.402,43.375 116.938,43.375 v1(118.322,44.759)
XTAL_IN: C2.1 U1.20 Y1.1 | length 7.5
  Top Layer w0.2: C2.1@112.782,40.495 C2.1 112.776,41.117 113.485,41.826 115.048,41.826 116.32,43.097 U1.20
  Top Layer w0.254: C2.1@112.782,40.495 Y1.1
XTAL_OUT: C1.1 R2.2 Y1.3 | length 4
  Top Layer w0.2: Y1.3 117.903,38.295 118.492,37.707 C1.1 R2.2
pads on no net: J1.1 J1.2 J1.3 J1.4 J1.A8 J1.B8 SW1.1 SW1.3 U1.2 U1.3 U1.4 U1.5 U1.6 U1.7 U1.8 U1.9 U1.11 U1.12 U1.13 U1.14 U1.15 U1.16 U1.17 U1.18 U1.27 U1.28 U1.29 U1.30 U1.31 U1.32 U1.34 U1.35 U1.36 U1.37 U1.40 U1.41 U2.MH2 U2.MH3 U3.MH2 U3.MH3

## Polygon pours and split planes (outlines as drawn)
GND on GND "GND_L02_P001" (solid, pour order 1): 85.268,77.368 85.268,0 133.782,0 133.782,77.368
+3V3 on 3V3 "+3V3_L03_P002" (solid, pour order 2): 85.268,77.368 133.782,77.368 133.782,0 85.268,0
+3V3 on Bottom Layer "+3V3_L04_P003" (solid, remove dead copper, pour order 3): 127.486,70.143 127.301,69.958 127.13,69.774 127.13,66.435 130.327,66.435 130.512,66.631 130.708,66.827 130.708,69.774 130.512,69.958 130.327,70.143
GND on Bottom Layer "GND_L04_P005" (solid, pour order 5): 85.268,77.368 133.782,77.368 133.782,0 85.268,0
GND on Top Layer "GND_L01_P000" (solid, remove dead copper, pour order 0): 85.268,77.368 85.268,0 133.782,0 133.782,77.368

## Silkscreen, mask and mechanical layers (free items; w line width, h text height)
Top Overlay:
  lines w0.254: 92.202,12.192 92.202,27.788 107.798,27.788 107.798,12.192 92.202,12.192 ; 111.265,12.192 111.265,27.796 126.848,27.796 126.848,12.192 111.265,12.192
  text "SWCLK" at 91.11,59.055 h0.7
  text "SWD" at 92.456,56.261 h0.7
  text "U2" at 124.333,28.423 h1.52
  text "U3" at 105.334,28.346 h1.52
Board:
  lines w0.254: 85.268,1.27 ccw(c86.538,1.27) 86.538,0 132.512,0 ccw(c132.512,1.27) 133.782,1.27 133.782,1.306 133.782,76.098 ccw(c132.512,76.098) 132.512,77.368 86.538,77.368 ccw(c86.538,76.098) 85.268,76.098 85.268,74.783 85.268,1.27